# Altium PCB LM-004-A.PcbDoc (part 2 of 2)
Units mil, origin at the board's own origin, x right, y up, seen from the top; angles counter-clockwise.
Board outline 2155 x 3832 mil, 4 copper layers (Top Layer, Signal Layer 2, Signal Layer 1, Bottom Layer), stack 30.635 mil thick; 82 components, 124 nets, 382 pads, 75 vias.
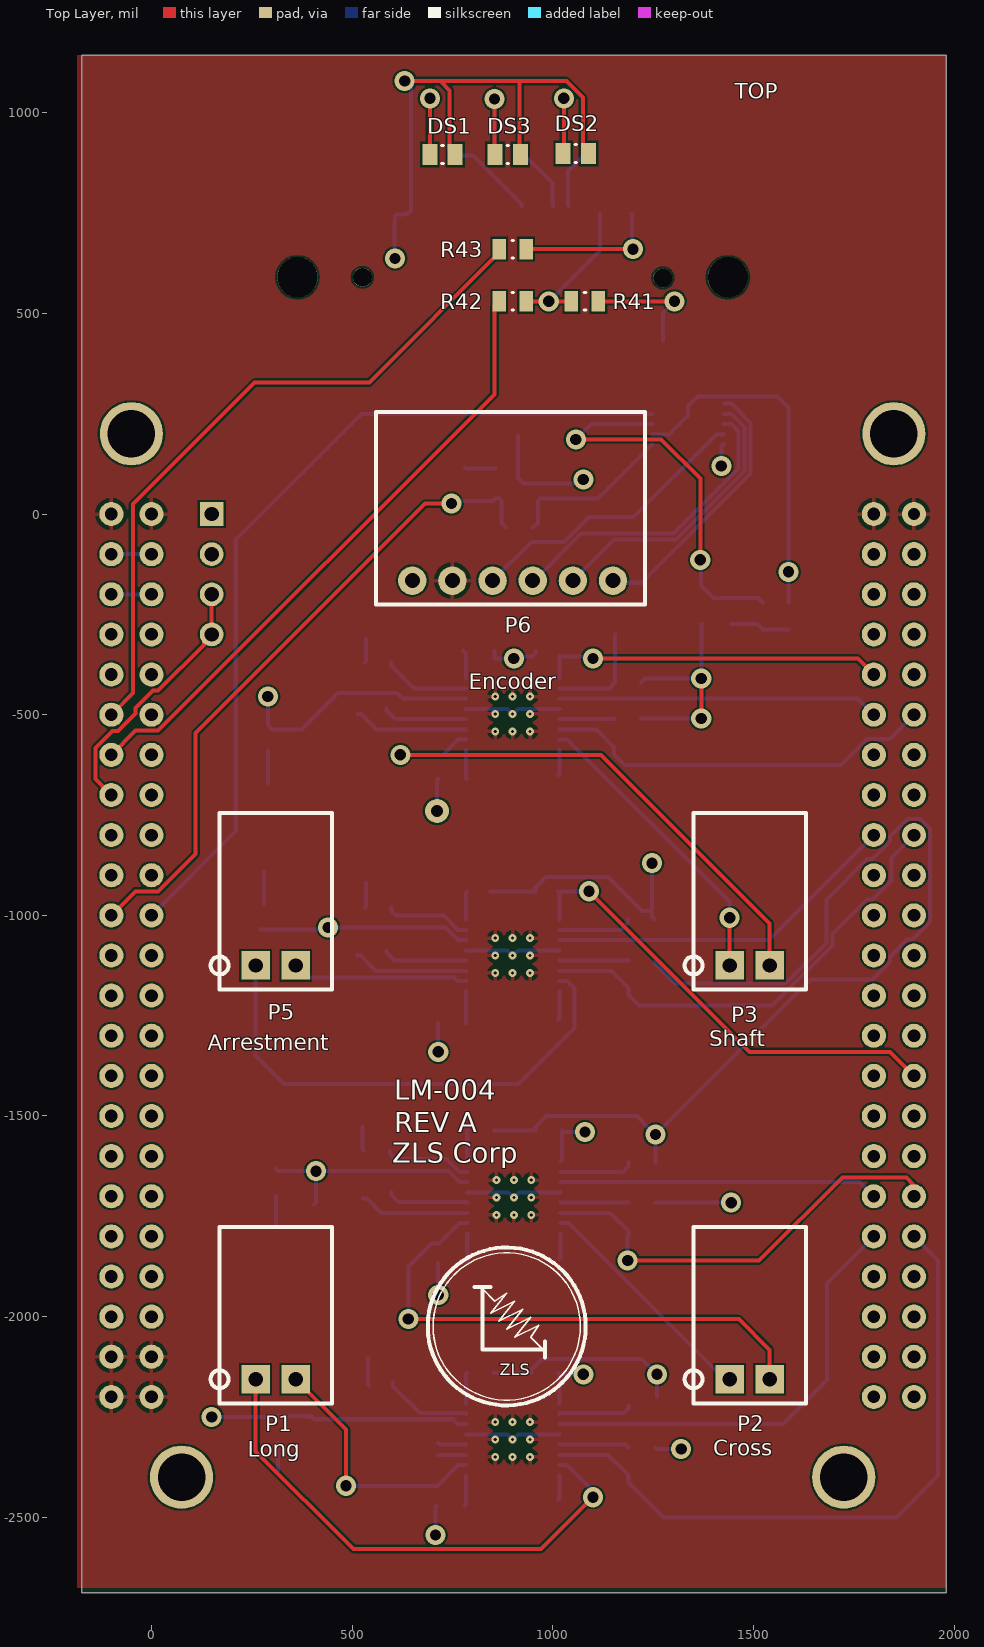
[diagram p0: Top Layer view]

## Via types
v1: diameter 50, hole 28, Top Layer to Bottom Layer, 39 vias
v2: diameter 19.68, hole 7.87, Top Layer to Bottom Layer, 36 vias

## Nets (pads, with @x,y where several pads share a name; then routed paths per layer and width w, separated by ;. In a path a pad name is that pad's centre, name@x,y a point inside that pad or via, vN(x,y) a via of type N, cw(c..) or ccw(c..) an arc to the next point about the centre after c; other vN are vias at no path point) (continued)
pads on no net: P7.hole P7.J2-5 P7.J2-6 P7.J2-7 P7.J2-8 P7.J2-9 P7.J2-10 P7.J2-12 P7.J2-15 P7.J2-17 P7.J2-19 P7.J2-20 P7.J3-1 P7.J3-2 P7.J3-3 P7.J3-4 P7.J3-5 P7.J3-6 P7.J3-7 P7.J3-8 P7.J3-9 P7.J3-10 P7.J3-11 P7.J3-12 P7.J3-13 P7.J3-14 P7.J3-15 P7.J3-16 P7.J3-17 P7.J3-18 P7.J3-19 U1. U1.8-20 U1.8-21 U1.8-24 U1.8-29 U1.8-45 U1.8-46 U1.9-7 U1.9-8 U1.9-10 U1.9-12 U1.9-19 U1.9-20 U1.9-23 U1.9-25 U1.9-27 U1.9-32 U1.9-33 U1.9-34 U1.9-35 U1.9-36 U1.9-37 U1.9-38 U1.9-39 U1.9-40 U1.9-41

## Polygon pours and split planes (outlines as drawn)
GND on Bottom Layer "GND" (solid, pour order 0): 1980,1143 1980,-2675.9 -145.98,-2675.9 -185.35,-2675.9 -185.35,1143
GND on Top Layer "GND" (solid, pour order 2): 1980,1143 1980,-2675.9 -145.98,-2675.9 -185.35,-2675.9 -185.35,1143

## Silkscreen, mask and mechanical layers (free items; w line width, h text height)
Top Overlay:
  circle w3.94: c885.19,-2024.39 r183.58
  circle w10: c885.19,-2024.39 r196.85
  lines w3.94: 825.19,-1931.39 855.19,-1961.39 885.19,-1941.39 845.19,-1991.39 905.19,-1961.39 865.19,-2011.39 925.19,-1981.39 885.19,-2031.39 945.19,-2001.39 905.19,-2051.39 965.19,-2021.39 945.19,-2051.39 975.19,-2081.39
  lines w10: 805.19,-1926.39 845.19,-1926.39 ; 825.19,-1931.39 825.19,-2081.39 975.19,-2081.39 ; 980.19,-2101.39 980.19,-2061.39
  text "TOP" at 1452.85,1034.5 h39.37
  text "Encoder" at 790,-436 h39.37
  text "Shaft" at 1390,-1326 h39.37
  text "Arrestment" at 140,-1336 h39.37
  text "LM-004" at 604.87,-1460 h50
  text "REV A" at 604.87,-1540 h50
  text "ZLS Corp" at 600,-1616.03 h50
  text "ZLS" at 867.98,-2145.84 h29.53
  text "Cross" at 1400,-2346 h39.37
  text "Long" at 240,-2349.31 h39.37

## Text inside footprints (layer, text, board x,y; h text height)
P7: Bottom Overlay "J2-1" at 177.48,715.99 h39.37; Bottom Overlay "J3-1" at 167.48,385.99 h39.37
U1: Bottom Overlay "P9" at -50,-2334.01 h39.37; Bottom Overlay "P8" at 1900,-2334.01 h39.37